# Altium PCB FRDM-Shield_Template.PcbDoc
Units mil, origin at the board's own origin, x right, y up, seen from the top; angles counter-clockwise.
Board outline 3211.75 x 2684.86 mil, 2 copper layers (Top Layer, Bottom Layer), stack 15.3 mil thick; 10 components, 61 nets, 132 pads, 0 vias.
Unrouted connection lines stored in the file: 6.
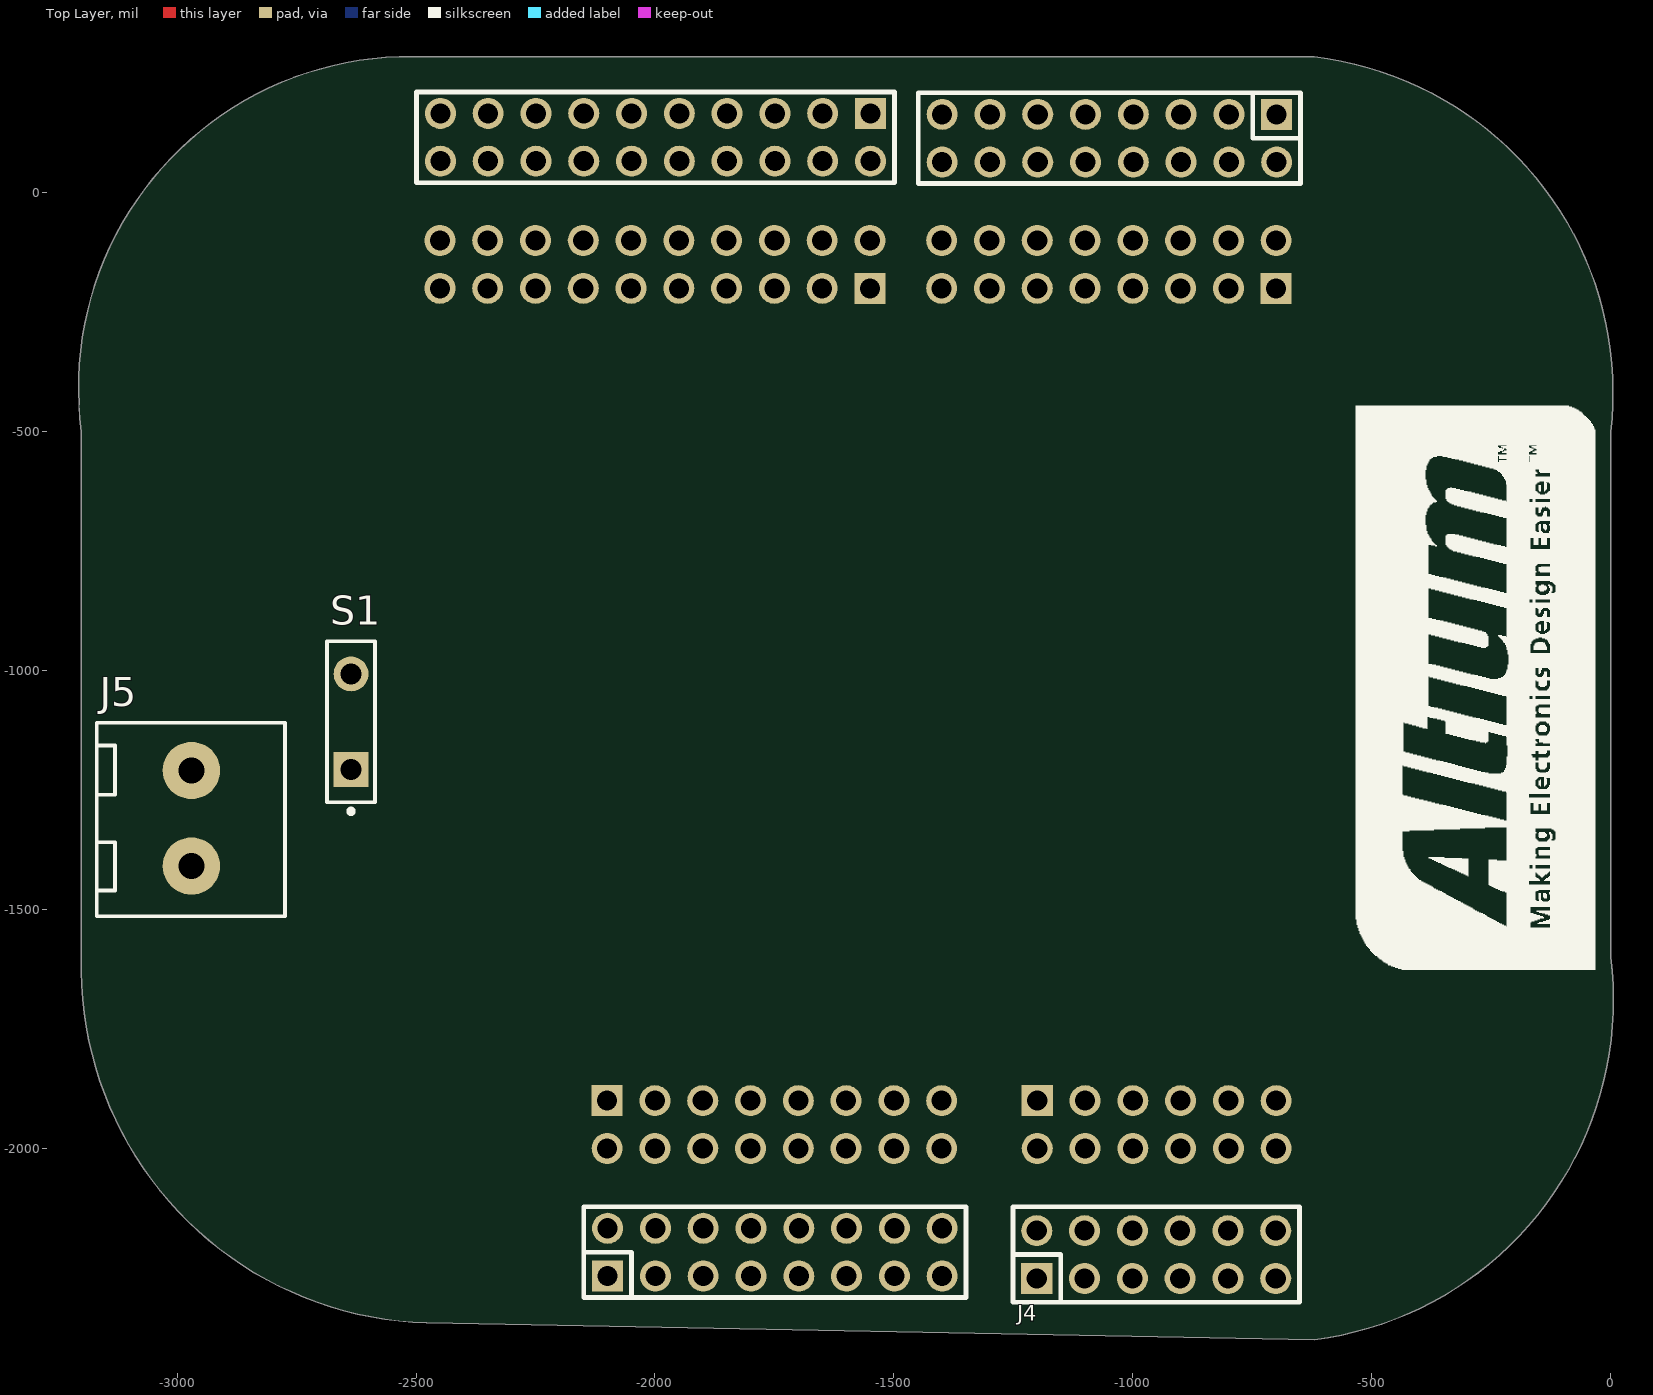
[diagram p0: Top Layer view]
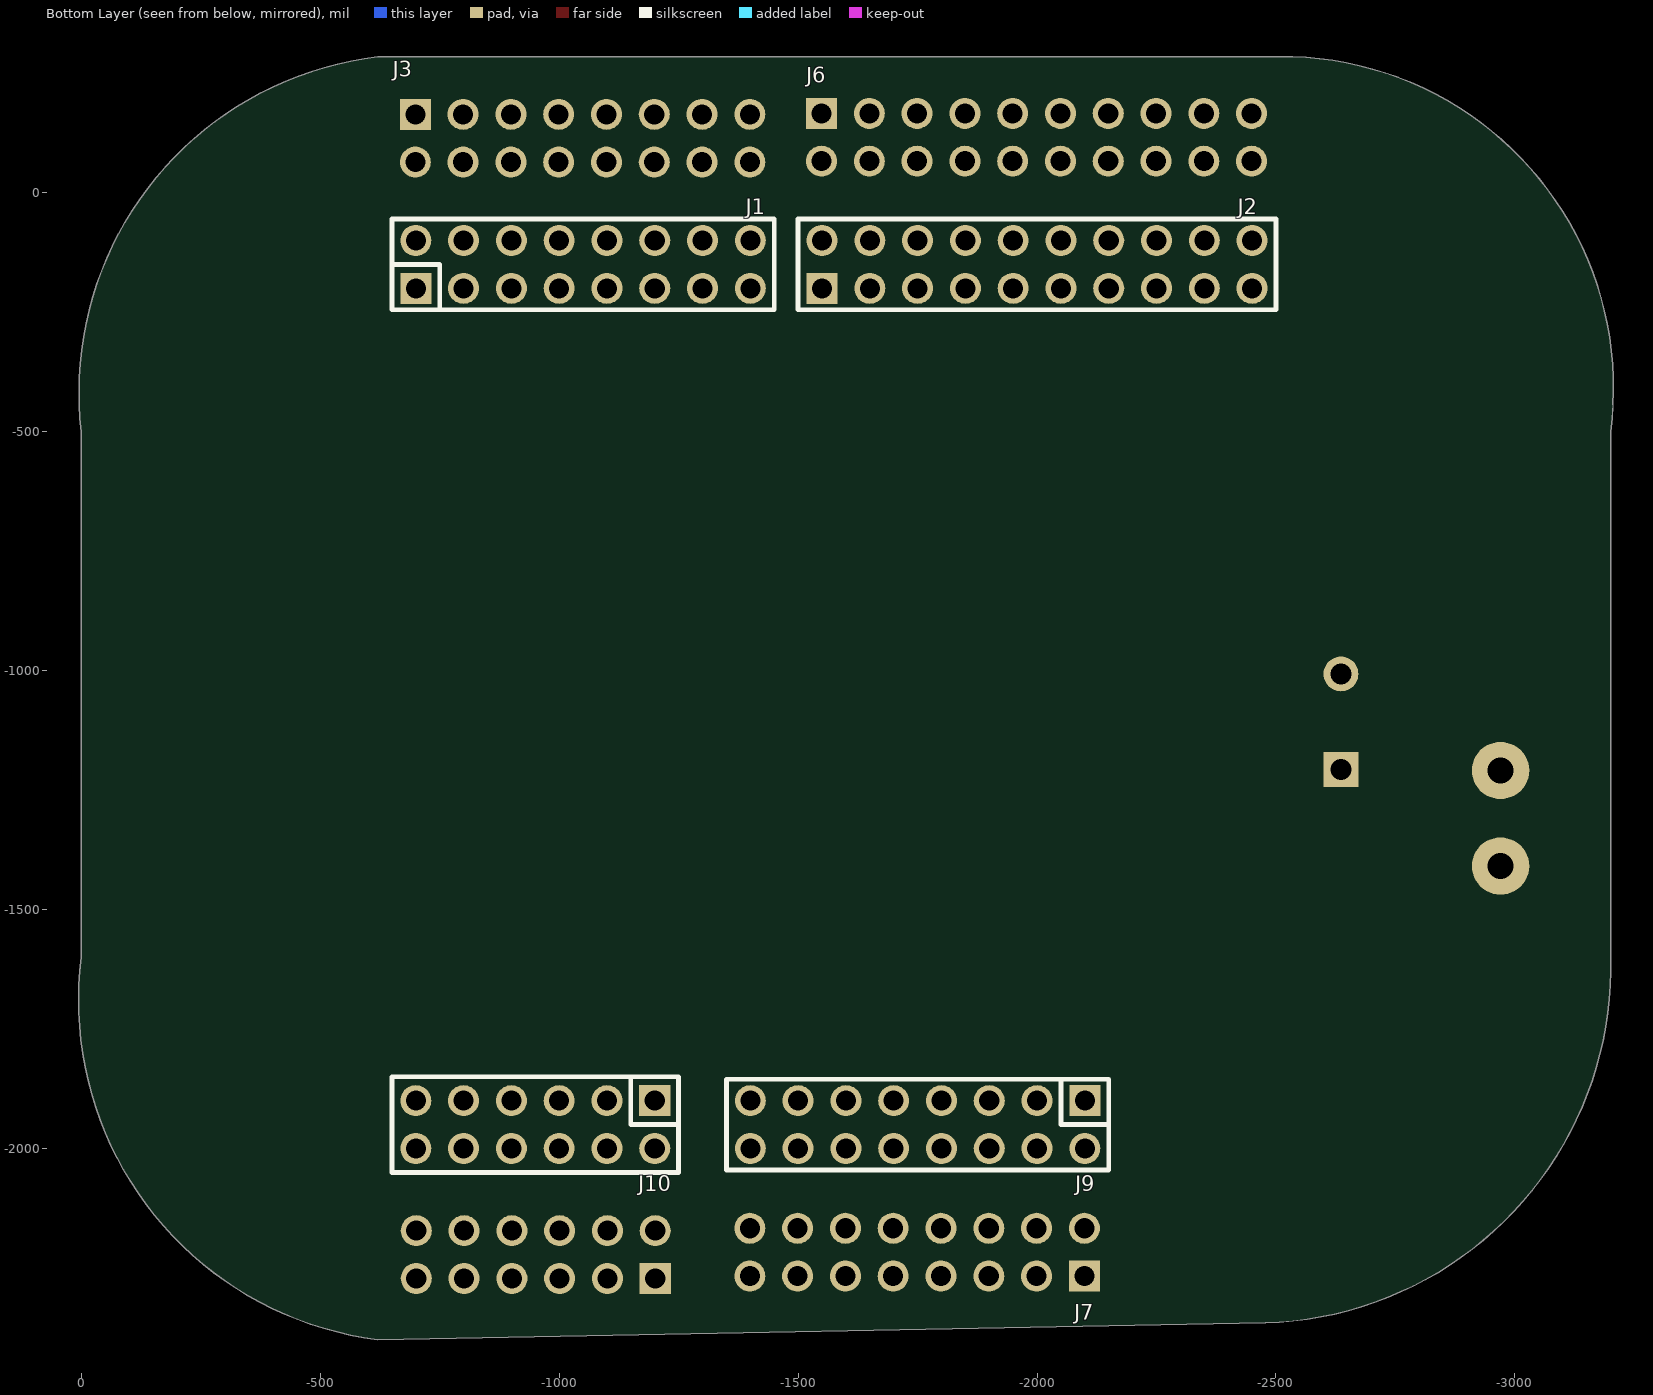
[diagram p1: Bottom Layer view, seen from below]

## Layer stack, top to bottom
Top Solder: solder mask 0.4, Solder Resist, Dk 3.5
Top Layer: signal copper 1.4
Dielectric1: core 12.5, FR-4, Dk 4.8
Bottom Layer: signal copper 1.4
Bottom Solder: solder mask 0.4, Solder Resist, Dk 3.5

## Board outline
-3200,-1600 ccw(c-2456.51,-1621.51) -2478.02,-2365 -620.19,-2400 ccw(c-710.1,-1689.91) 0,-1600 0,-500 ccw(c-702.09,-418.09) -620.19,284 -989,284 -1736,284 -2478.02,284 ccw(c-2513.25,-407.99) -3200,-500

## Design rules (kind name [scope] priority, off if disabled: settings)
Clearance Polygon [(InNet('GND') AND InPoly)] p1: gap=10
Clearance [All] p2: gap=6
ComponentClearance [All] p1: gap=0 collisioncheckmode=3 verticalgap=0 showdistances=FALSE
Height [All] p1: minheight=0 maxheight=1500 prefheight=500
HoleSize [All] p1: absolutevalues=TRUE maxlimit=250 minlimit=1 maxpercent=80.000 minpercent=20.000
HoleToHoleClearance [All] p1: gap=2 allowstackedmicrovias=TRUE
MinimumSolderMaskSliver [All] p1: minsoldermaskwidth=0
PlaneConnect [All] p1: planeconnectstyle=Direct reliefexpansion=20 reliefentries=4 reliefconductorwidth=10 reliefairgap=10
PolygonConnect PolygonConnect_1 [IsVia] p1: connectstyle=Direct reliefconductorwidth=10 reliefentries=4 polygonreliefangle="90 Angle" airgapwidth=10
PolygonConnect [All] p2: connectstyle=Relief reliefconductorwidth=10 reliefentries=4 polygonreliefangle="90 Angle" airgapwidth=10
RoutingVias [All] p1: holewidth=12 width=24 viastyle="Through Hole" minholewidth=12 minwidth=24 maxholewidth=50 maxwidth=100
ShortCircuit ShortCircuit_1 [HasFootprint('4-40 X 250') vs HasFootprint('4-40 X 250')] p1: allowed=TRUE
ShortCircuit [All] p2: allowed=FALSE
SilkToSilkClearance [All] p1: silktosilkclearance=0
SilkToSolderMaskClearance SilkscreenOverComponentPads [IsPad] p1: minsilkscreentomaskgap=0 clearancetoexposedcopper=TRUE
SolderMaskExpansion [All] p1: expansion=4
Width [All] p1: maxlimit=100 minlimit=6 preferedwidth=6
21 further rules are at their usual default settings.

## Components (designator, comment, footprint, x,y, rotation, side; value= is the part's Value field where it differs from the comment)
J1 "67996-416HLF" 67996-416HLF#1 -1050,-150 r180 bottom locked
J2 "67996-420HLF" 67996-420HLF#1 -2000,-150 r180 bottom locked
J3 "67996-416HLF" 67996-416HLF#2 -1050,116 r0 bottom
J4 "67996-412HLF" 67996-412HLF#1 -951,-2227 r180 top locked
J5 "282857-2" 282857-2 -2970,-1209 r180 top
J6 "67996-420HLF" 67996-420HLF#2 -1999,116 r0 bottom
J7 "67996-416HLF" 67996-416HLF#2 -1748,-2219 r180 bottom locked
J9 "67996-416HLF" 67996-416HLF#1 -1750,-1950 r0 bottom locked
J10 "67996-412HLF" 67996-412HLF#2 -950,-1950 r0 bottom locked
S1 "SW-PB" SPST-2 -2636,-1107 r90 top

## Footprints (in the part's own frame and the unit in brackets; to place one, negate y for a bottom-side part, rotate by r counter-clockwise, add the part's x,y. Pads: shape width x height; smd on the part's side, far side on the other; paste and mask are expansions set on the pad)
67996-412HLF#1 [mil] "CONN HEADER 12POS .100 STR TIN"
  rect 65x65 hole 42: 1(250,45)
  round 65 hole 42: 2(250,-55) 3(150,45) 4(150,-55) 5(50,45) 6(50,-55) 7(-50,45) 8(-50,-55) 9(-150,45) 10(-150,-55) 11(-250,45) 12(-250,-55)
  silkscreen extent -300,-105 300,95, body extent -300,-100 300,100, height 80
67996-412HLF#2 [mil] "CONN HEADER 12POS .100 STR TIN"
  rect 65x65 hole 42: 1(-250,-50)
  round 65 hole 42: 2(-250,50) 3(-150,-50) 4(-150,50) 5(-50,-50) 6(-50,50) 7(50,-50) 8(50,50) 9(150,-50) 10(150,50) 11(250,-50) 12(250,50)
  silkscreen extent -300,-100 300,100, body extent -300,-100 300,100, height 331
67996-416HLF#1 [mil] "CONN HEADER 16POS .100 STR TIN"
  rect 65x65 hole 42: 1(-350,-50)
  round 65 hole 42: 2(-350,50) 3(-250,-50) 4(-250,50) 5(-150,-50) 6(-150,50) 7(-50,-50) 8(-50,50) 9(50,-50) 10(50,50) 11(150,-50) 12(150,50) 13(250,-50) 14(250,50) 15(350,-50) 16(350,50)
  silkscreen extent -400,-95 400,95, body extent -400,-95 400,95, height 305
67996-416HLF#2 [mil] "CONN HEADER 16POS .100 STR TIN"
  rect 65x65 hole 42: 1(351,-48)
  round 65 hole 42: 2(351,52) 3(251,-48) 4(251,52) 5(151,-48) 6(151,52) 7(51,-48) 8(51,52) 9(-49,-48) 10(-49,52) 11(-149,-48) 12(-149,52) 13(-249,-48) 14(-249,52) 15(-349,-48) 16(-349,52)
  body extent -399,-93 401,97, height 305
67996-420HLF#1 [mil] "CONN HEADER 20POS .100 STR TIN"
  rect 65x65 hole 42: 1(-450,-50)
  round 65 hole 42: 2(-450,50) 3(-350,-50) 4(-350,50) 5(-250,-50) 6(-250,50) 7(-150,-50) 8(-150,50) 9(-50,-50) 10(-50,50) 11(50,-50) 12(50,50) 13(150,-50) 14(150,50) 15(250,-50) 16(250,50) 17(350,-50) 18(350,50) 19(450,-50) 20(450,50)
  silkscreen extent -500,-95 500,95, body extent -500,-95 500,95, height 305
67996-420HLF#2 [mil] "CONN 20 PIN 0.100 IN"
  rect 65x65 hole 42: 1(450,-50)
  round 65 hole 42: 2(450,50) 3(350,-50) 4(350,50) 5(250,-50) 6(250,50) 7(150,-50) 8(150,50) 9(50,-50) 10(50,50) 11(-50,-50) 12(-50,50) 13(-150,-50) 14(-150,50) 15(-250,-50) 16(-250,50) 17(-350,-50) 18(-350,50) 19(-450,-50) 20(-450,50)
  body extent -500,-95 500,95, height 305
282857-2 [mil] "TE CONNECTIVITY / BUCHANAN  282857-2  Wire-To-Board Terminal Block, 2, 300 V, 24 A, 30 AWG, 12 AWG, 3 mm²"
  round 120 hole 55: 1(0,0) 2(0,200)
  silkscreen extent -196,-100 198,305, body extent -196,-100 198,320, height 752
SPST-2 [mm] "Switch; 2 Leads"
  rect 1.85x1.85 hole 1.1: 1(-2.54,0)
  round 1.85 hole 1.1: 2(2.54,0)
  silkscreen extent -4.89,-1.27 4.28,1.27

## Part data
J1 J3 J7 J9: "CONN HEADER 16POS .100 STR TIN"
J2 J6: "CONN HEADER 20POS .100 STR TIN"
J4 J10: "CONN HEADER 12POS .100 STR TIN"
J5: "TERM BLOCK 2POS SIDE ENT 5.08MM"
S1: "Switch"

## Nets (pads, with @x,y where several pads share a name; then routed paths per layer and width w, separated by ;. In a path a pad name is that pad's centre, name@x,y a point inside that pad or via, vN(x,y) a via of type N, cw(c..) or ccw(c..) an arc to the next point about the centre after c; other vN are vias at no path point)
+3.3V: J9.4 J9.8
+V_BATTERY: J9.16 S1.2
GND: J2.14 J5.2 J9.12 J9.14
NetJ5_1: J5.1 S1.1
P5V_USB: J9.10
PTA1: J1.2
PTA2: J1.4
PTA4: J1.10
PTA5: J1.12
PTA12: J1.8
PTA13: J2.2
PTA16: J2.9
PTA17: J2.11
PTB0: J10.2
PTB1: J10.4
PTB2: J10.6
PTB3: J10.8
PTB8: J9.1
PTB9: J9.3
PTB10: J9.5
PTB11: J9.7
PTC0: J1.3
PTC1: J10.12
PTC2: J10.10
PTC3: J1.5
PTC4: J1.7
PTC5: J1.9
PTC6: J1.11
PTC7: J1.1
PTC8: J1.14
PTC9: J1.16
PTC10: J1.13
PTC11: J1.15
PTC12: J2.1
PTC13: J2.3
PTC16: J2.5
PTC17: J2.7
PTD0: J2.6
PTD1: J2.12
PTD2: J2.8
PTD3: J2.10
PTD4: J1.6
PTD5: J2.4
PTD6: J2.17
PTD7: J2.19
PTE0: J2.18
PTE1: J2.20
PTE2: J9.9
PTE3: J9.11
PTE4: J9.13
PTE5: J9.15
PTE20: J10.1
PTE21: J10.3
PTE22: J10.5
PTE23: J10.7
PTE29: J10.9
PTE30: J10.11
PTE31: J2.13
RESET/PTA20: J9.6
SDA_PTD5: J9.2
VREFH: J2.16
pads on no net: J2.15 J3.1 J3.2 J3.3 J3.4 J3.5 J3.6 J3.7 J3.8 J3.9 J3.10 J3.11 J3.12 J3.13 J3.14 J3.15 J3.16 J4.1 J4.2 J4.3 J4.4 J4.5 J4.6 J4.7 J4.8 J4.9 J4.10 J4.11 J4.12 J6.1 J6.2 J6.3 J6.4 J6.5 J6.6 J6.7 J6.8 J6.9 J6.10 J6.11 J6.12 J6.13 J6.14 J6.15 J6.16 J6.17 J6.18 J6.19 J6.20 J7.1 J7.2 J7.3 J7.4 J7.5 J7.6 J7.7 J7.8 J7.9 J7.10 J7.11 J7.12 J7.13 J7.14 J7.15 J7.16

## Silkscreen, mask and mechanical layers (free items; w line width, h text height)
Top Overlay:
  drawing of 1840 lines, arcs and shapes, not listed